# EAGLE board sensor finish rosalina (EAGLE 7.5.0)
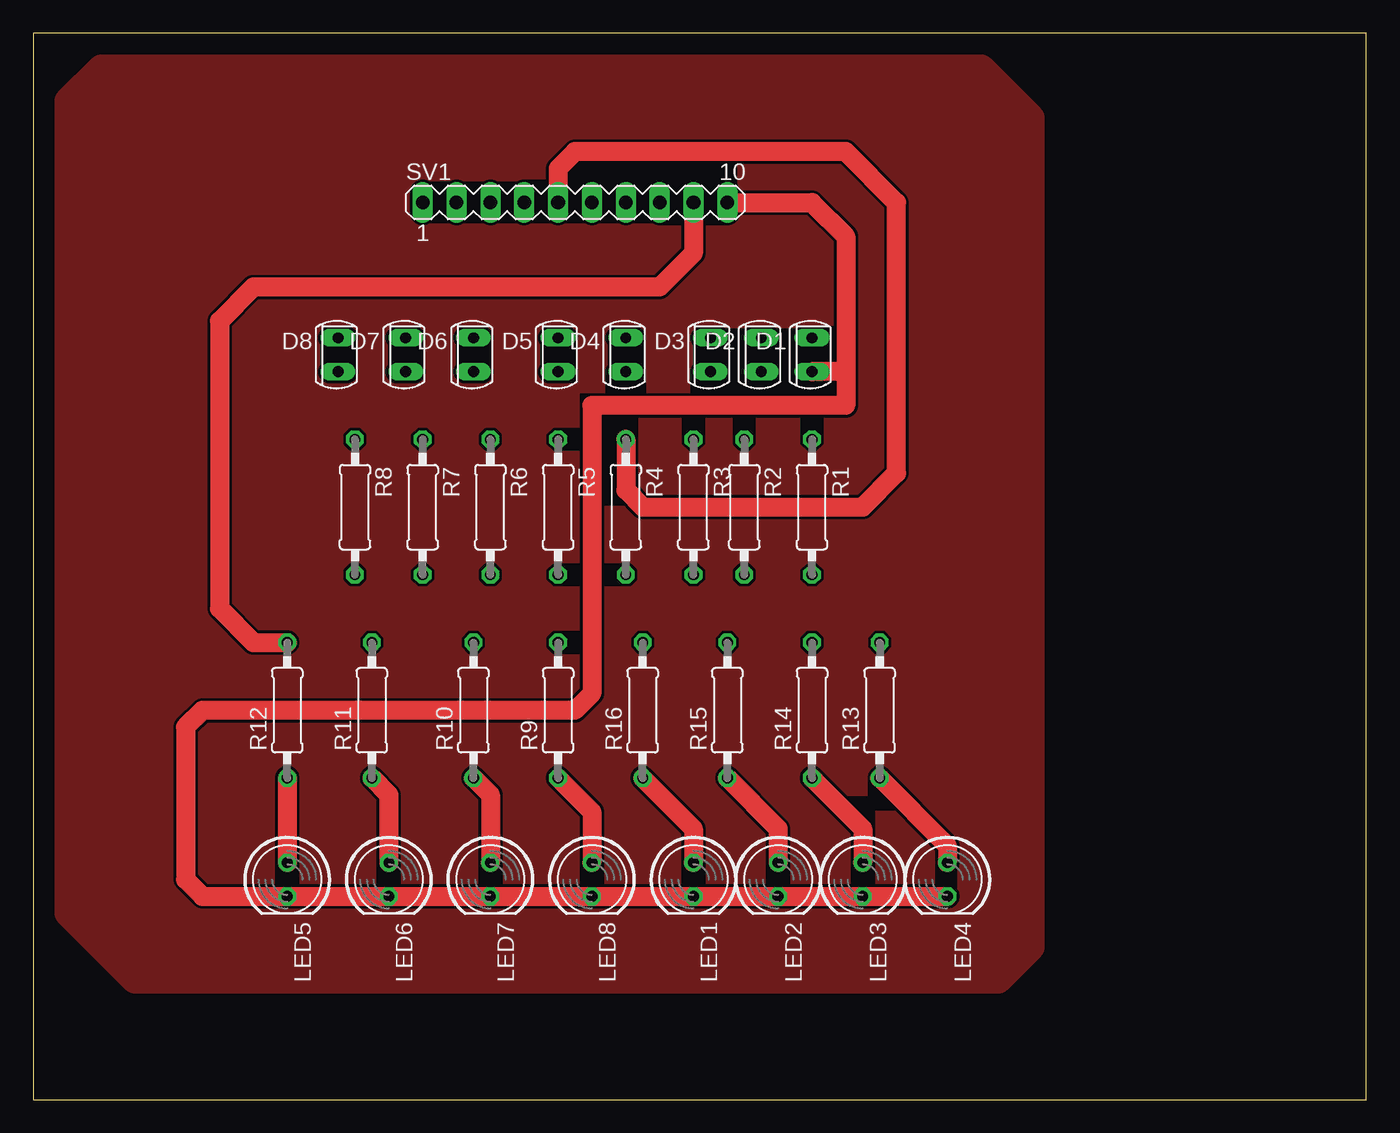
[diagram p0: board, top side]
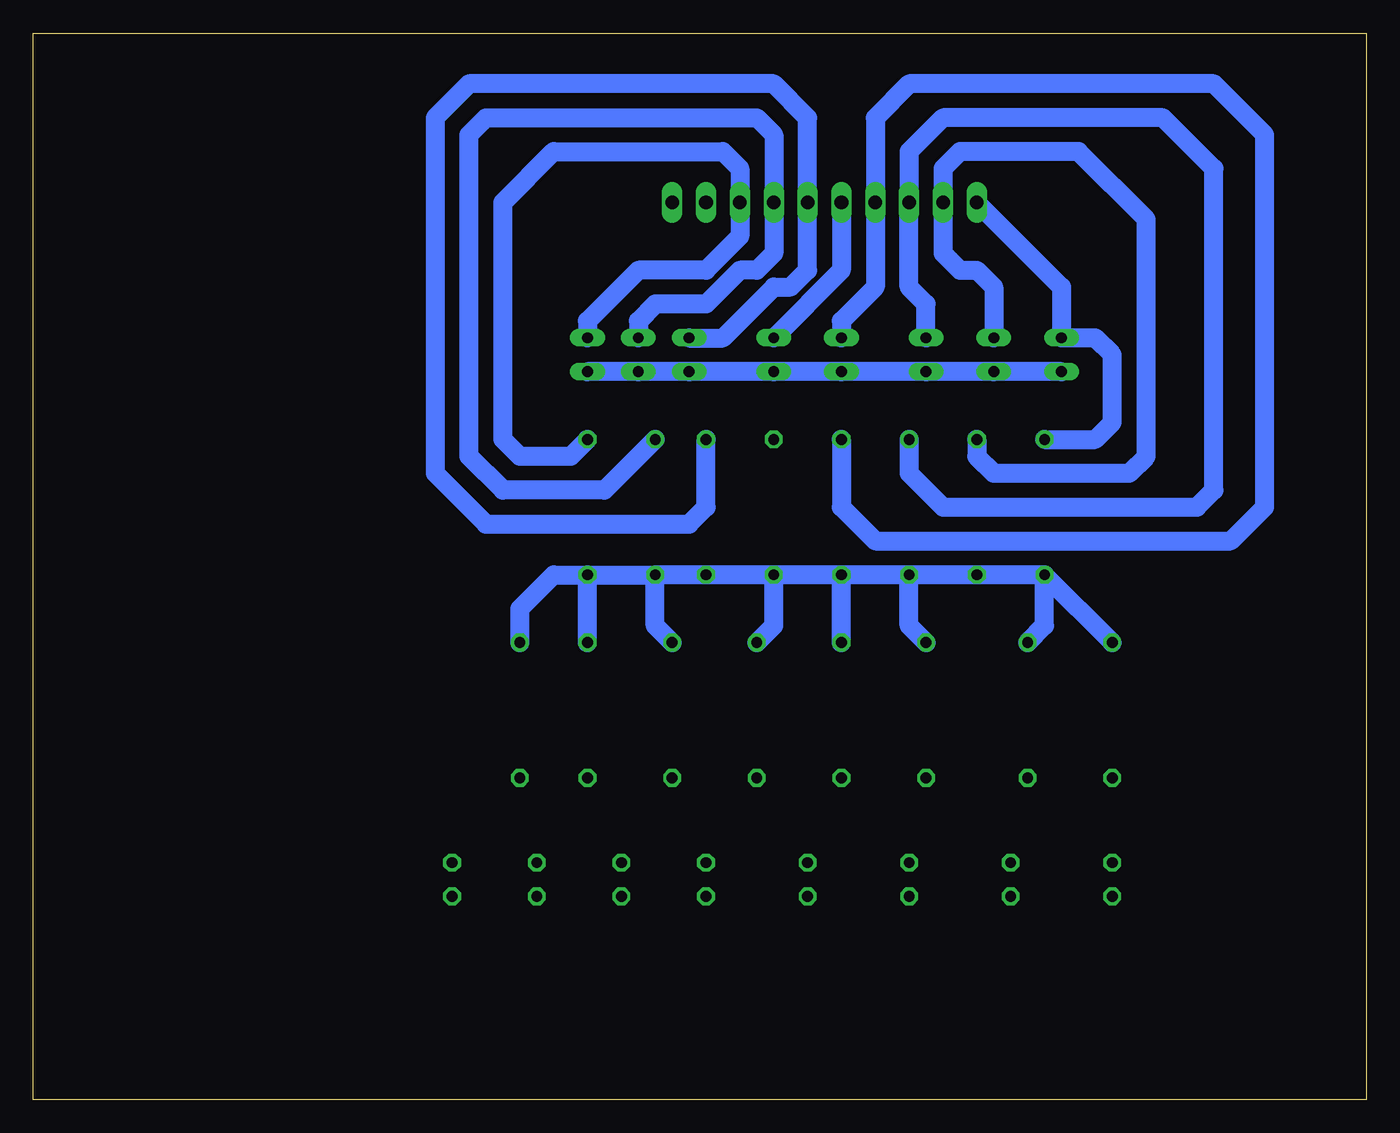
[diagram p1: board, bottom side, seen from below]

Size 100 x 80 mm. Coordinates in mm from the lower left corner, seen from the top.
Outline: 0,0 100,0 100,80 0,80 0,0
Copper layers (1*16): Top 0.035mm / dielectric 1.5mm / Bottom 0.035mm
Design rules "default": minimum track width 10mil, minimum drill 24mil, track to track 8mil, track to pad 8mil, pad to pad 8mil, via to via 8mil, smd to smd 8mil, copper to edge 40mil, drill to drill 8mil, minimum pad ring 10mil, minimum via ring 8mil, stop-mask expansion 4mil, vias tented up to drill 0mil, thermal gap 10mil

## Footprints (pad centres in the part's own frame; a part is rotated, then mirrored left to right if it is on the bottom)
SFH225 = drill 0.813 long: A 0,1.27; K 0,-1.27
LED5MM = drill 0.813 octagon: A -1.27,0; K 1.27,0
0207/10 = drill 0.813 octagon: 1 -5.08,0; 2 5.08,0
MA10-1 = drill 1.016 long: 1 -11.43,0; 2 -8.89,0; 3 -6.35,0; 4 -3.81,0; 5 -1.27,0; 6 1.27,0; 7 3.81,0; 8 6.35,0; 9 8.89,0; 10 11.43,0

## Placement (x,y rotation side)
D1  PhotoDioda  [SFH225]  58.42,55.88 180 top
D2  PhotoDioda  [SFH225]  54.61,55.88 180 top
D3  PhotoDioda  [SFH225]  50.8,55.88 180 top
D4  PhotoDioda  [SFH225]  44.45,55.88 180 top
D5  PhotoDioda  [SFH225]  39.37,55.88 180 top
D6  PhotoDioda  [SFH225]  33.02,55.88 180 top
D7  PhotoDioda  [SFH225]  27.94,55.88 180 top
D8  PhotoDioda  [SFH225]  22.86,55.88 180 top
LED1  LED putih SB  [LED5MM]  49.53,16.51 270 top
LED2  LED putih SB  [LED5MM]  55.88,16.51 270 top
LED3  LED putih SB  [LED5MM]  62.23,16.51 270 top
LED4  LED putih SB  [LED5MM]  68.58,16.51 270 top
LED5  LED putih SB  [LED5MM]  19.05,16.51 270 top
LED6  LED putih SB  [LED5MM]  26.67,16.51 270 top
LED7  LED putih SB  [LED5MM]  34.29,16.51 270 top
LED8  LED putih SB  [LED5MM]  41.91,16.51 270 top
R1  [0207/10]  58.42,44.45 270 top
R2  [0207/10]  53.34,44.45 270 top
R3  [0207/10]  49.53,44.45 270 top
R4  [0207/10]  44.45,44.45 270 top
R5  [0207/10]  39.37,44.45 270 top
R6  [0207/10]  34.29,44.45 270 top
R7  [0207/10]  29.21,44.45 270 top
R8  [0207/10]  24.13,44.45 270 top
R9  330  [0207/10]  39.37,29.21 90 top
R10  330  [0207/10]  33.02,29.21 90 top
R11  330  [0207/10]  25.4,29.21 90 top
R12  330  [0207/10]  19.05,29.21 90 top
R13  330  [0207/10]  63.5,29.21 90 top
R14  330  [0207/10]  58.42,29.21 90 top
R15  330  [0207/10]  52.07,29.21 90 top
R16  330  [0207/10]  45.72,29.21 90 top
SV1  [MA10-1]  40.64,67.31 0 top

## Library data of the parts
D1-D8 = opto-trans-siemens
LED1-LED8 = led
R1-R16 = resistor
SV1 = con-lstb

## Nets
GND: D1.A D2.A D3.A D4.A D5.A D6.A D7.A D8.A LED1.K LED2.K LED3.K LED4.K LED5.K LED6.K LED7.K LED8.K SV1.10
N$1: LED7.A R10.1
N$2: D7.K R7.1 SV1.2
N$3: D8.K R8.1 SV1.1
N$4: D1.K R1.1 SV1.8
N$5: D2.K R2.1 SV1.7
N$6: D3.K R3.1 SV1.6
N$7: D5.K R5.1 SV1.4
N$8: D4.K R4.1 SV1.5
N$9: D6.K R6.1 SV1.3
N$10: LED6.A R11.1
N$11: LED5.A R12.1
N$12: LED4.A R13.1
N$13: LED3.A R14.1
N$14: LED2.A R15.1
N$15: LED1.A R16.1
N$16: LED8.A R9.1
VCC: R1.2 R2.2 R3.2 R4.2 R5.2 R6.2 R7.2 R8.2 R9.2 R10.2 R11.2 R12.2 R13.2 R14.2 R15.2 R16.2 SV1.9

## Tracks (layer width: path | path; a pad name or v marks a point on that pad's centre or on a via)
GND
  Top 1.422: SV1.10 58.42,67.31 60.96,64.77 60.96,54.61 | 60.96,54.61 D1.A | 60.96,54.61 60.96,52.07 41.91,52.07 41.91,30.48 40.64,29.21 12.7,29.21 11.43,27.94 11.43,16.51 12.7,15.24 LED5.K LED6.K LED7.K LED8.K LED1.K LED2.K LED3.K LED4.K
  Bottom 1.422: D8.A D7.A D6.A D5.A D4.A D3.A D2.A D1.A
N$1
  Top 1.422: R10.1 34.29,22.86 LED7.A
N$2
  Bottom 1.422: D7.K 27.94,60.96 29.21,62.23 30.48,62.23 31.75,63.5 SV1.2 31.75,69.85 30.48,71.12 21.59,71.12 16.51,66.04 16.51,48.26 17.78,46.99 27.94,46.99 29.21,48.26 R7.1
N$3
  Bottom 1.422: SV1.1 22.86,60.96 D8.K 20.32,57.15 19.05,55.88 19.05,50.8 20.32,49.53 R8.1
N$4
  Bottom 1.422: D1.K 58.42,58.42 54.61,62.23 49.53,62.23 46.99,64.77 SV1.8 46.99,69.85 48.26,71.12 60.96,71.12 64.77,67.31 64.77,49.53 63.5,48.26 59.69,48.26 R1.1
N$5
  Bottom 1.422: D2.K 54.61,58.42 53.34,59.69 49.53,59.69 46.99,62.23 45.72,62.23 44.45,63.5 SV1.7 44.45,72.39 45.72,73.66 66.04,73.66 67.31,72.39 67.31,48.26 64.77,45.72 57.15,45.72 R2.1
N$6
  Bottom 1.422: D3.K 48.26,57.15 44.45,60.96 43.18,60.96 41.91,62.23 SV1.6 41.91,73.66 44.45,76.2 67.31,76.2 69.85,73.66 69.85,46.99 66.04,43.18 50.8,43.18 49.53,44.45 R3.1
N$7
  Bottom 1.422: D5.K 39.37,58.42 36.83,60.96 SV1.4 36.83,73.66 34.29,76.2 11.43,76.2 7.62,72.39 7.62,44.45 10.16,41.91 36.83,41.91 39.37,44.45 R5.1
N$8
  Top 1.422: R4.1 44.45,45.72 45.72,44.45 62.23,44.45 64.77,46.99 64.77,67.31 60.96,71.12 40.64,71.12 39.37,69.85 SV1.5
  Bottom 1.422: SV1.5 39.37,62.23 D4.K
N$9
  Bottom 1.422: D6.K 33.02,59.69 34.29,60.96 SV1.3 34.29,71.12 31.75,73.66 15.24,73.66 11.43,69.85 11.43,45.72 12.7,44.45 31.75,44.45 34.29,46.99 R6.1
N$10
  Top 1.422: R11.1 26.67,22.86 LED6.A
N$11
  Top 1.422: R12.1 LED5.A
N$12
  Top 1.422: R13.1 68.58,19.05 LED4.A
N$13
  Top 1.422: R14.1 62.23,20.32 LED3.A
N$14
  Top 1.422: R15.1 55.88,20.32 LED2.A
N$15
  Top 1.422: R16.1 49.53,20.32 LED1.A
N$16
  Top 1.422: R9.1 41.91,21.59 LED8.A
N$17
  pour Top: 5.08,77.47 71.12,77.47 74.93,73.66 74.93,11.43 72.39,8.89 7.62,8.89 2.54,13.97 2.54,74.93
VCC
  Top 1.422: SV1.9 49.53,63.5 46.99,60.96 16.51,60.96 13.97,58.42 13.97,36.83 16.51,34.29 R12.2
  Bottom 1.422: R1.2 R2.2 | R2.2 R3.2 R4.2 | R5.2 R4.2 | R6.2 R5.2 | R8.2 R7.2 R6.2 | R11.2 24.13,35.56 R8.2 | R10.2 34.29,35.56 R6.2 | R9.2 R5.2 | R16.2 44.45,35.56 R4.2 | R15.2 53.34,35.56 R2.2 | R14.2 R1.2 | R13.2 63.5,36.83 60.96,39.37 R1.2 | R12.2 R8.2